# Altium PCB board_layout_alternative.pcbdoc
Units mm, origin at the board's own origin, x right, y up, seen from the top; angles counter-clockwise.
Board outline 98 x 98 mm, 4 copper layers (Top Layer, Mid Layer Top, Mid Layer Bottom, Bottom Layer), stack 1.742 mm thick; 20 components, 0 nets, 54 pads, 0 vias.
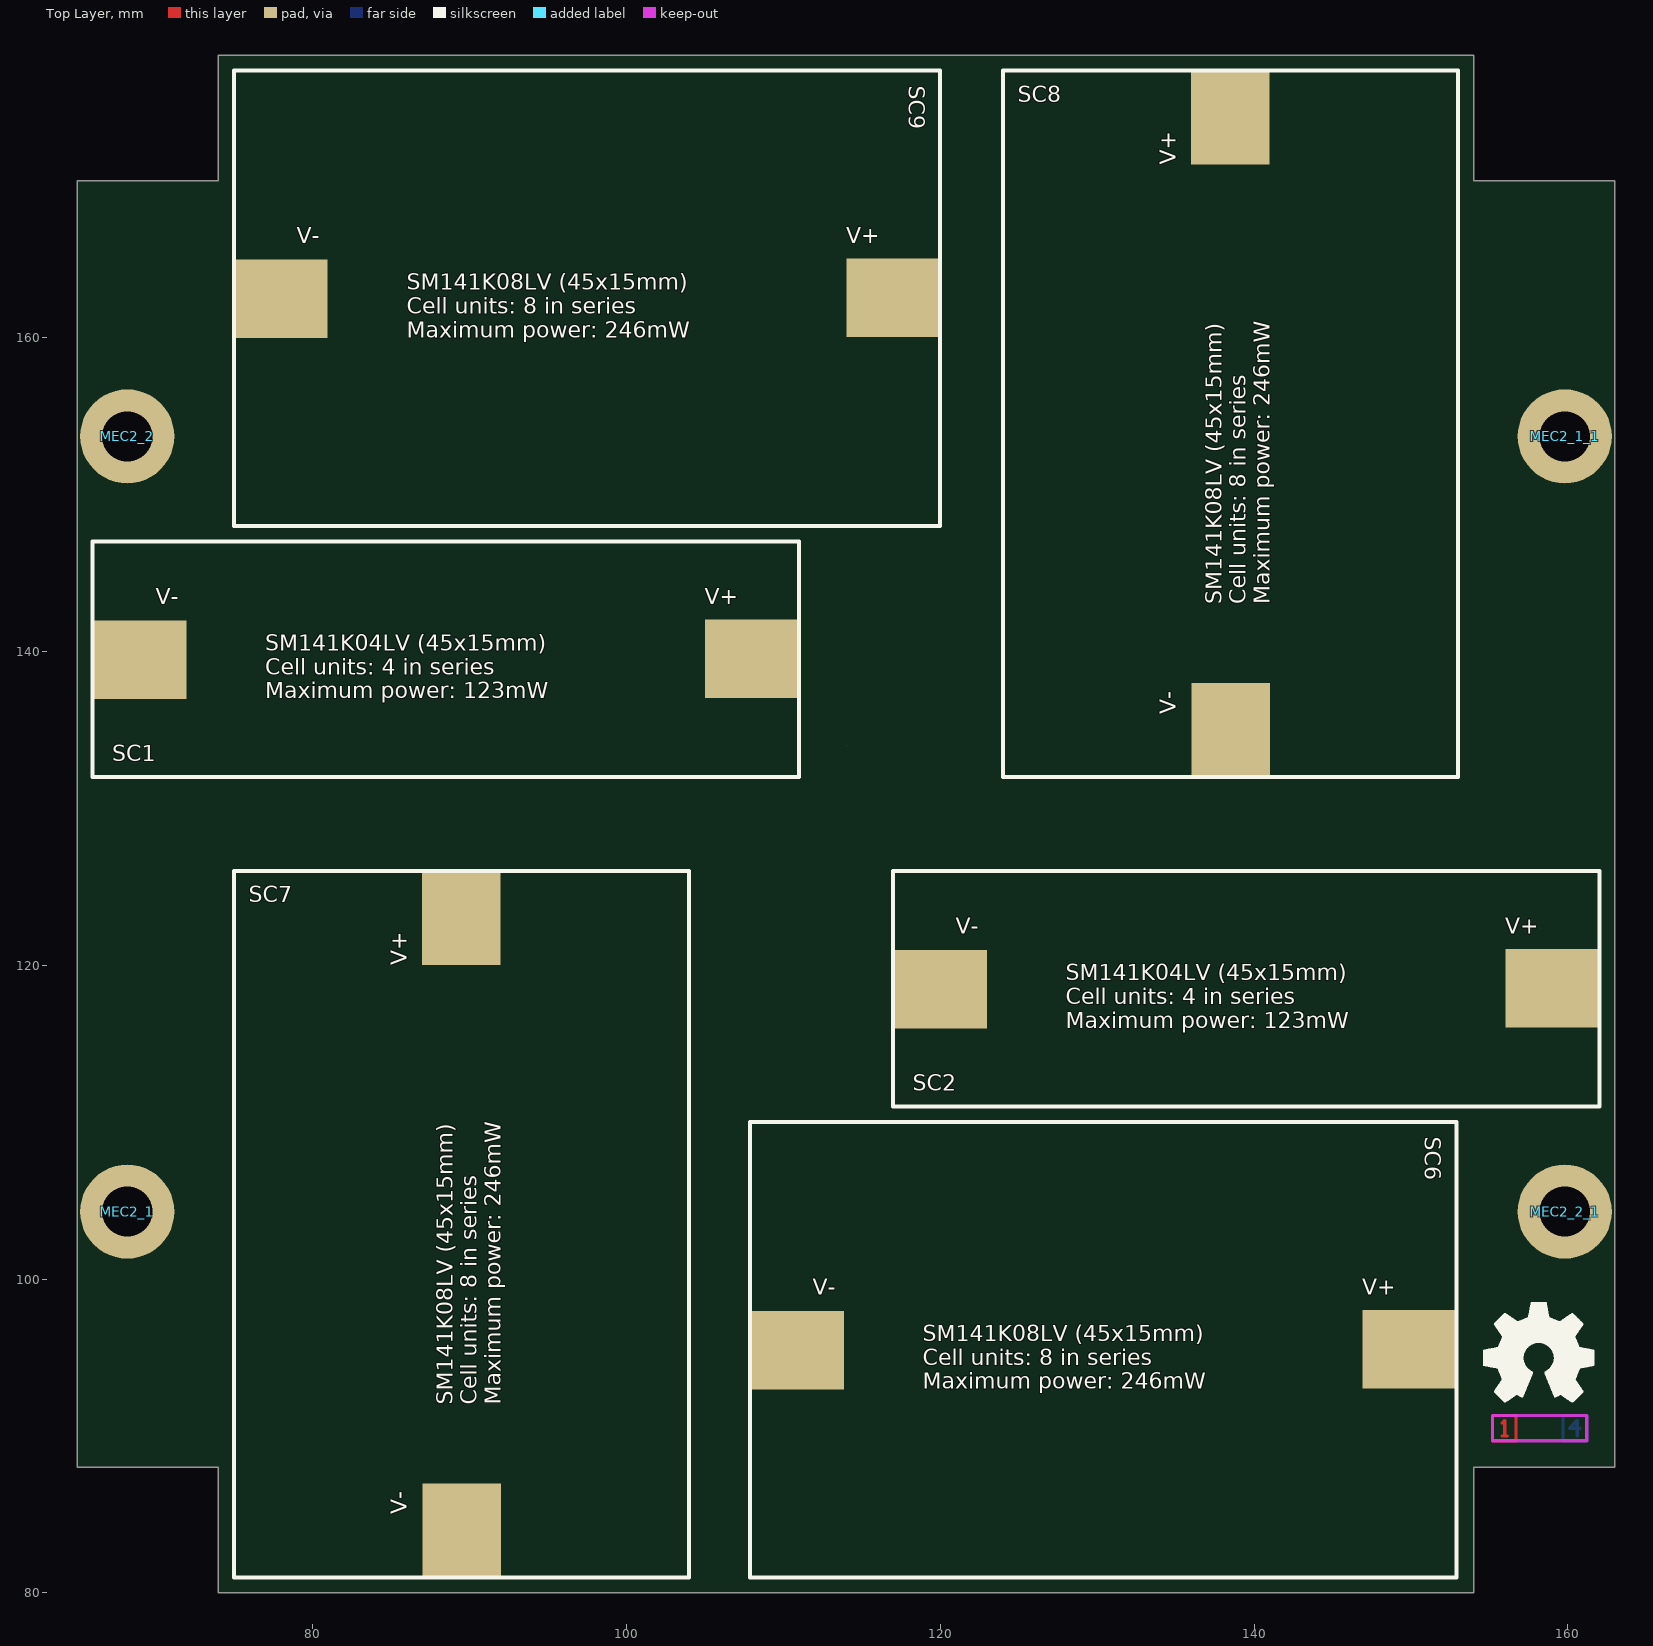
[diagram p0: Top Layer view]
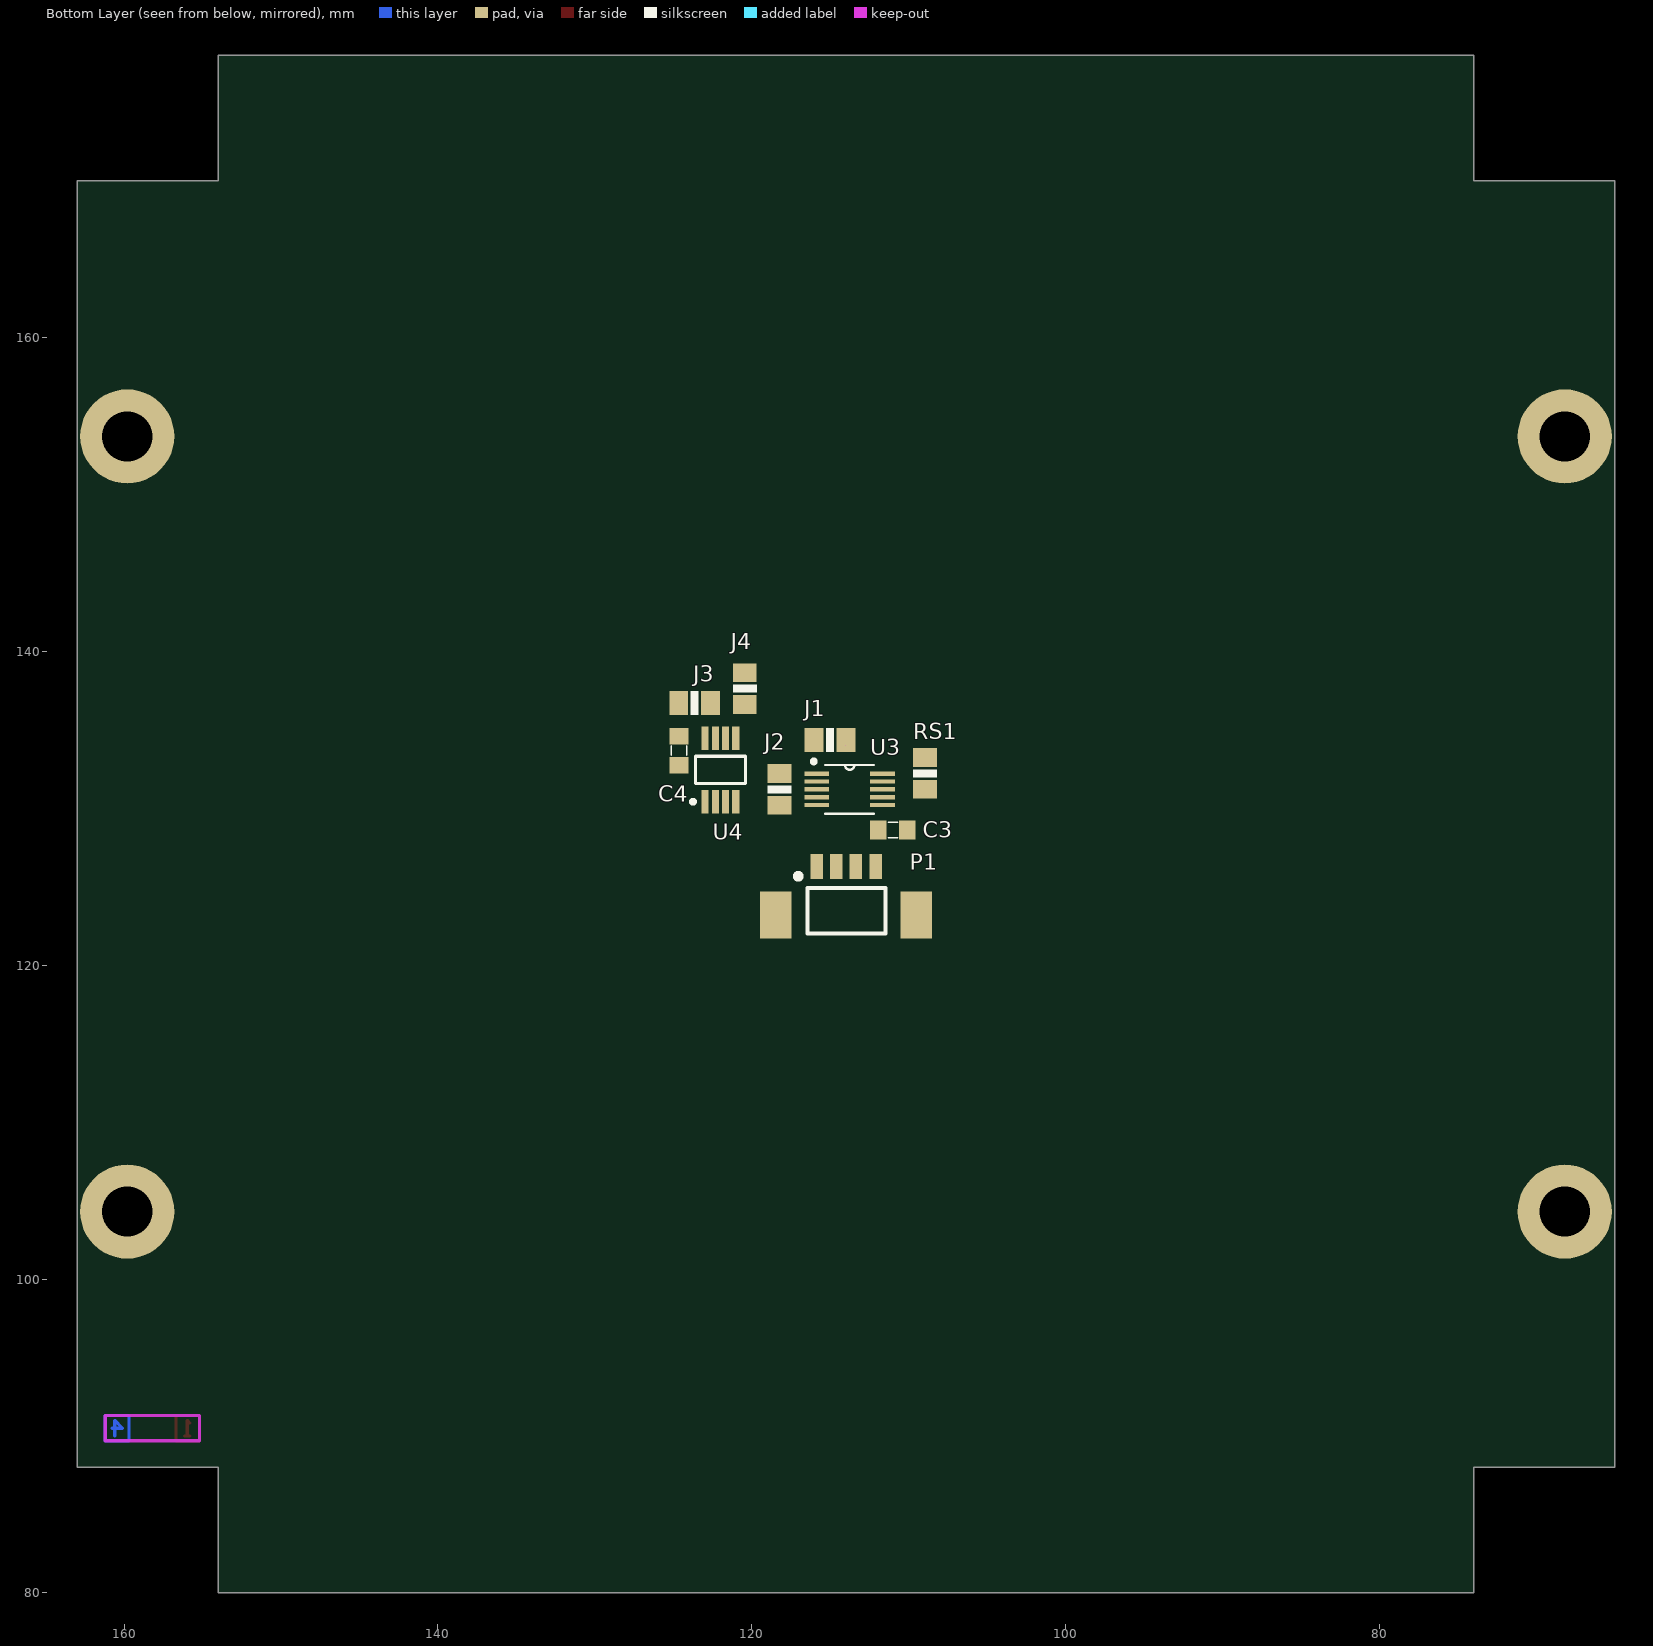
[diagram p1: Bottom Layer view, seen from below]
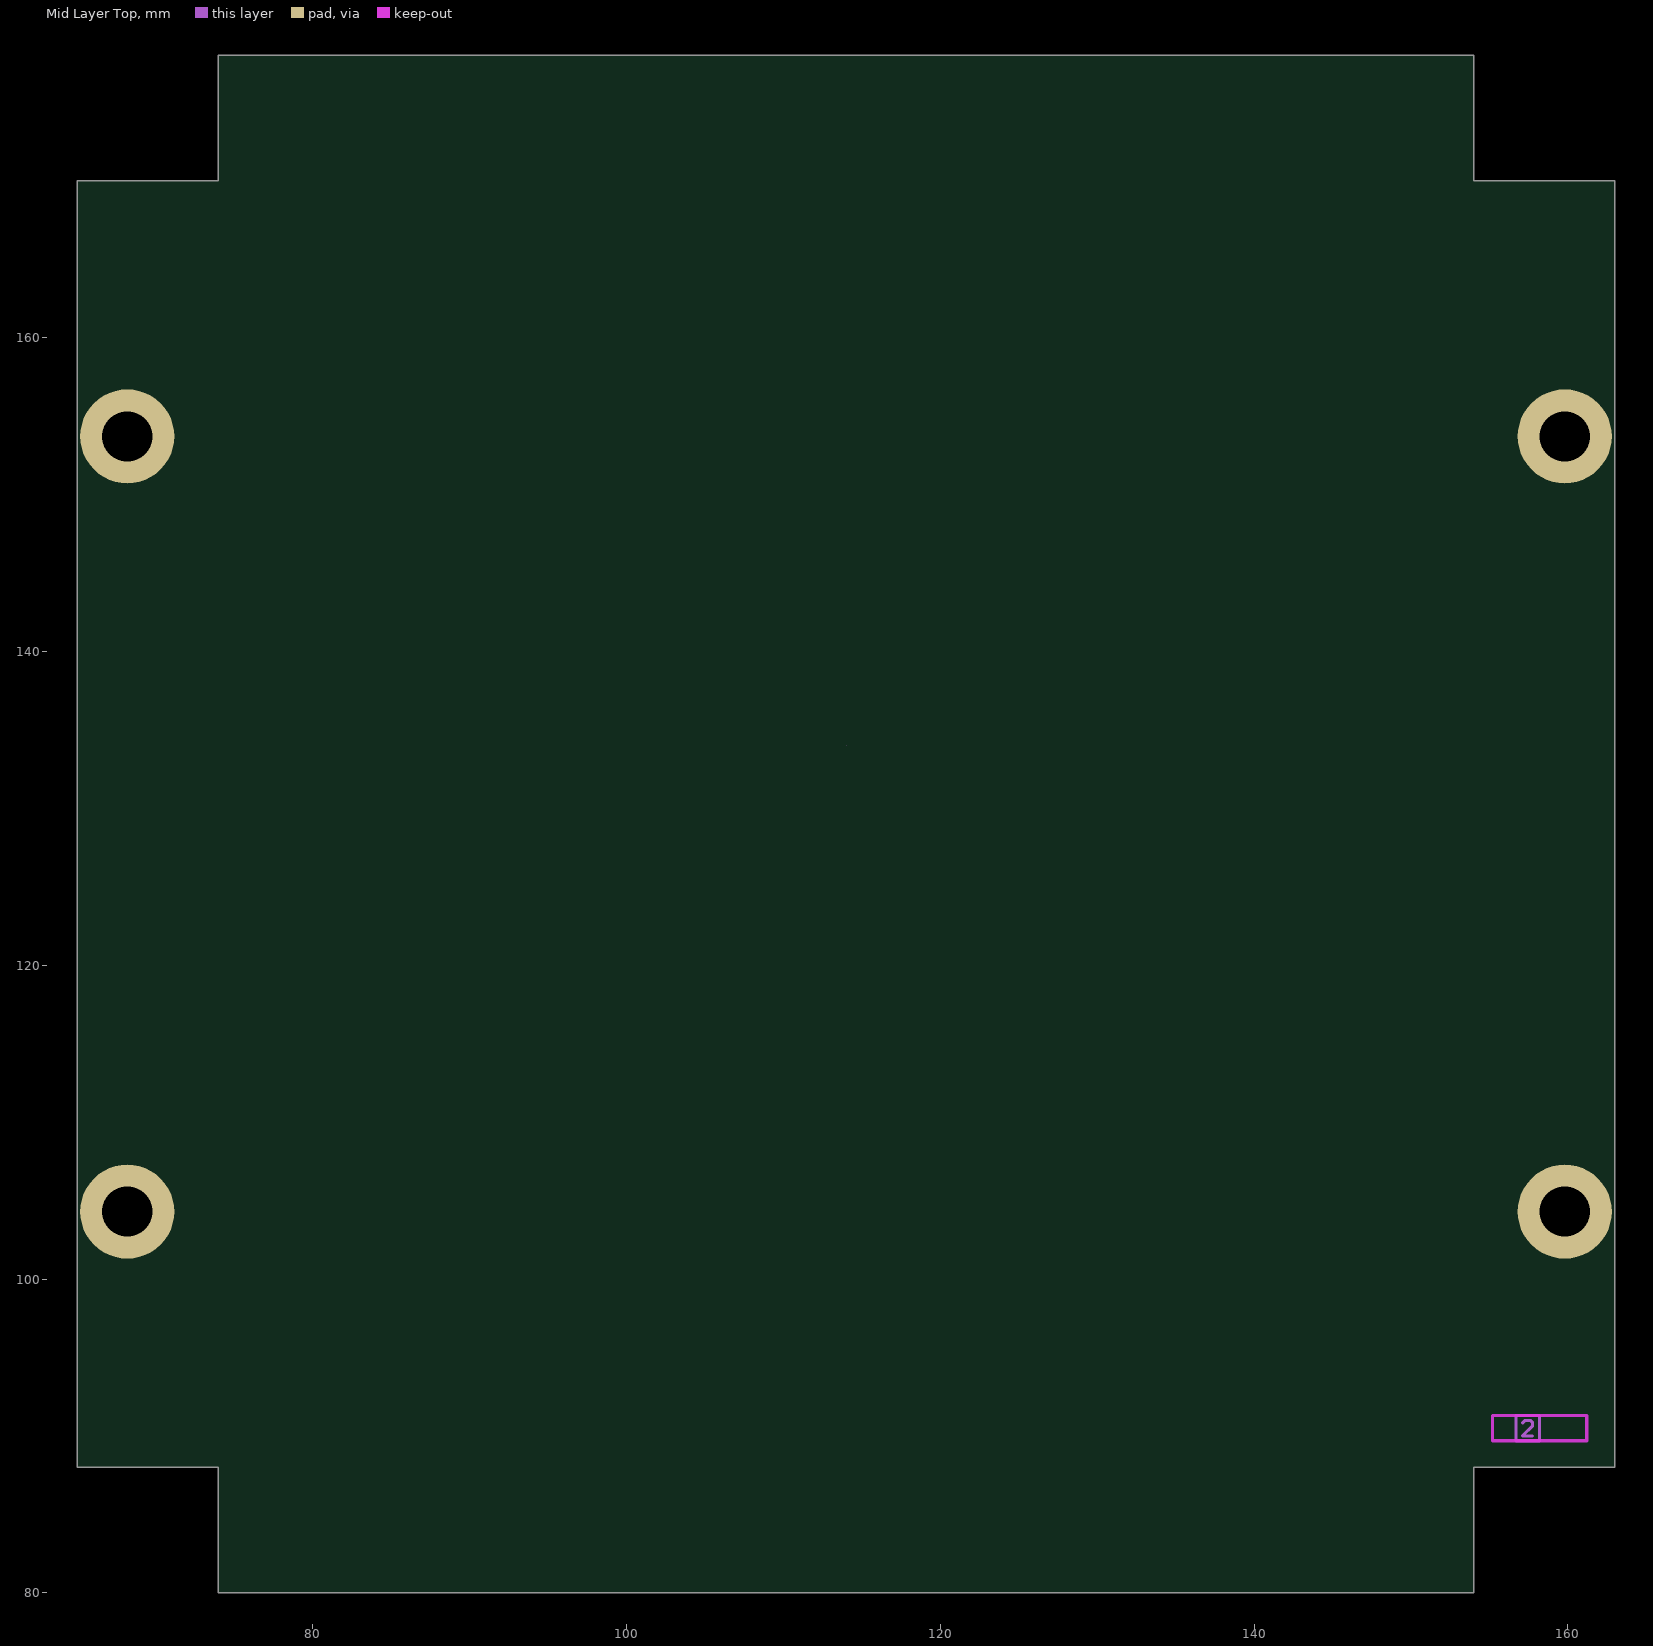
[diagram p2: Mid Layer Top]
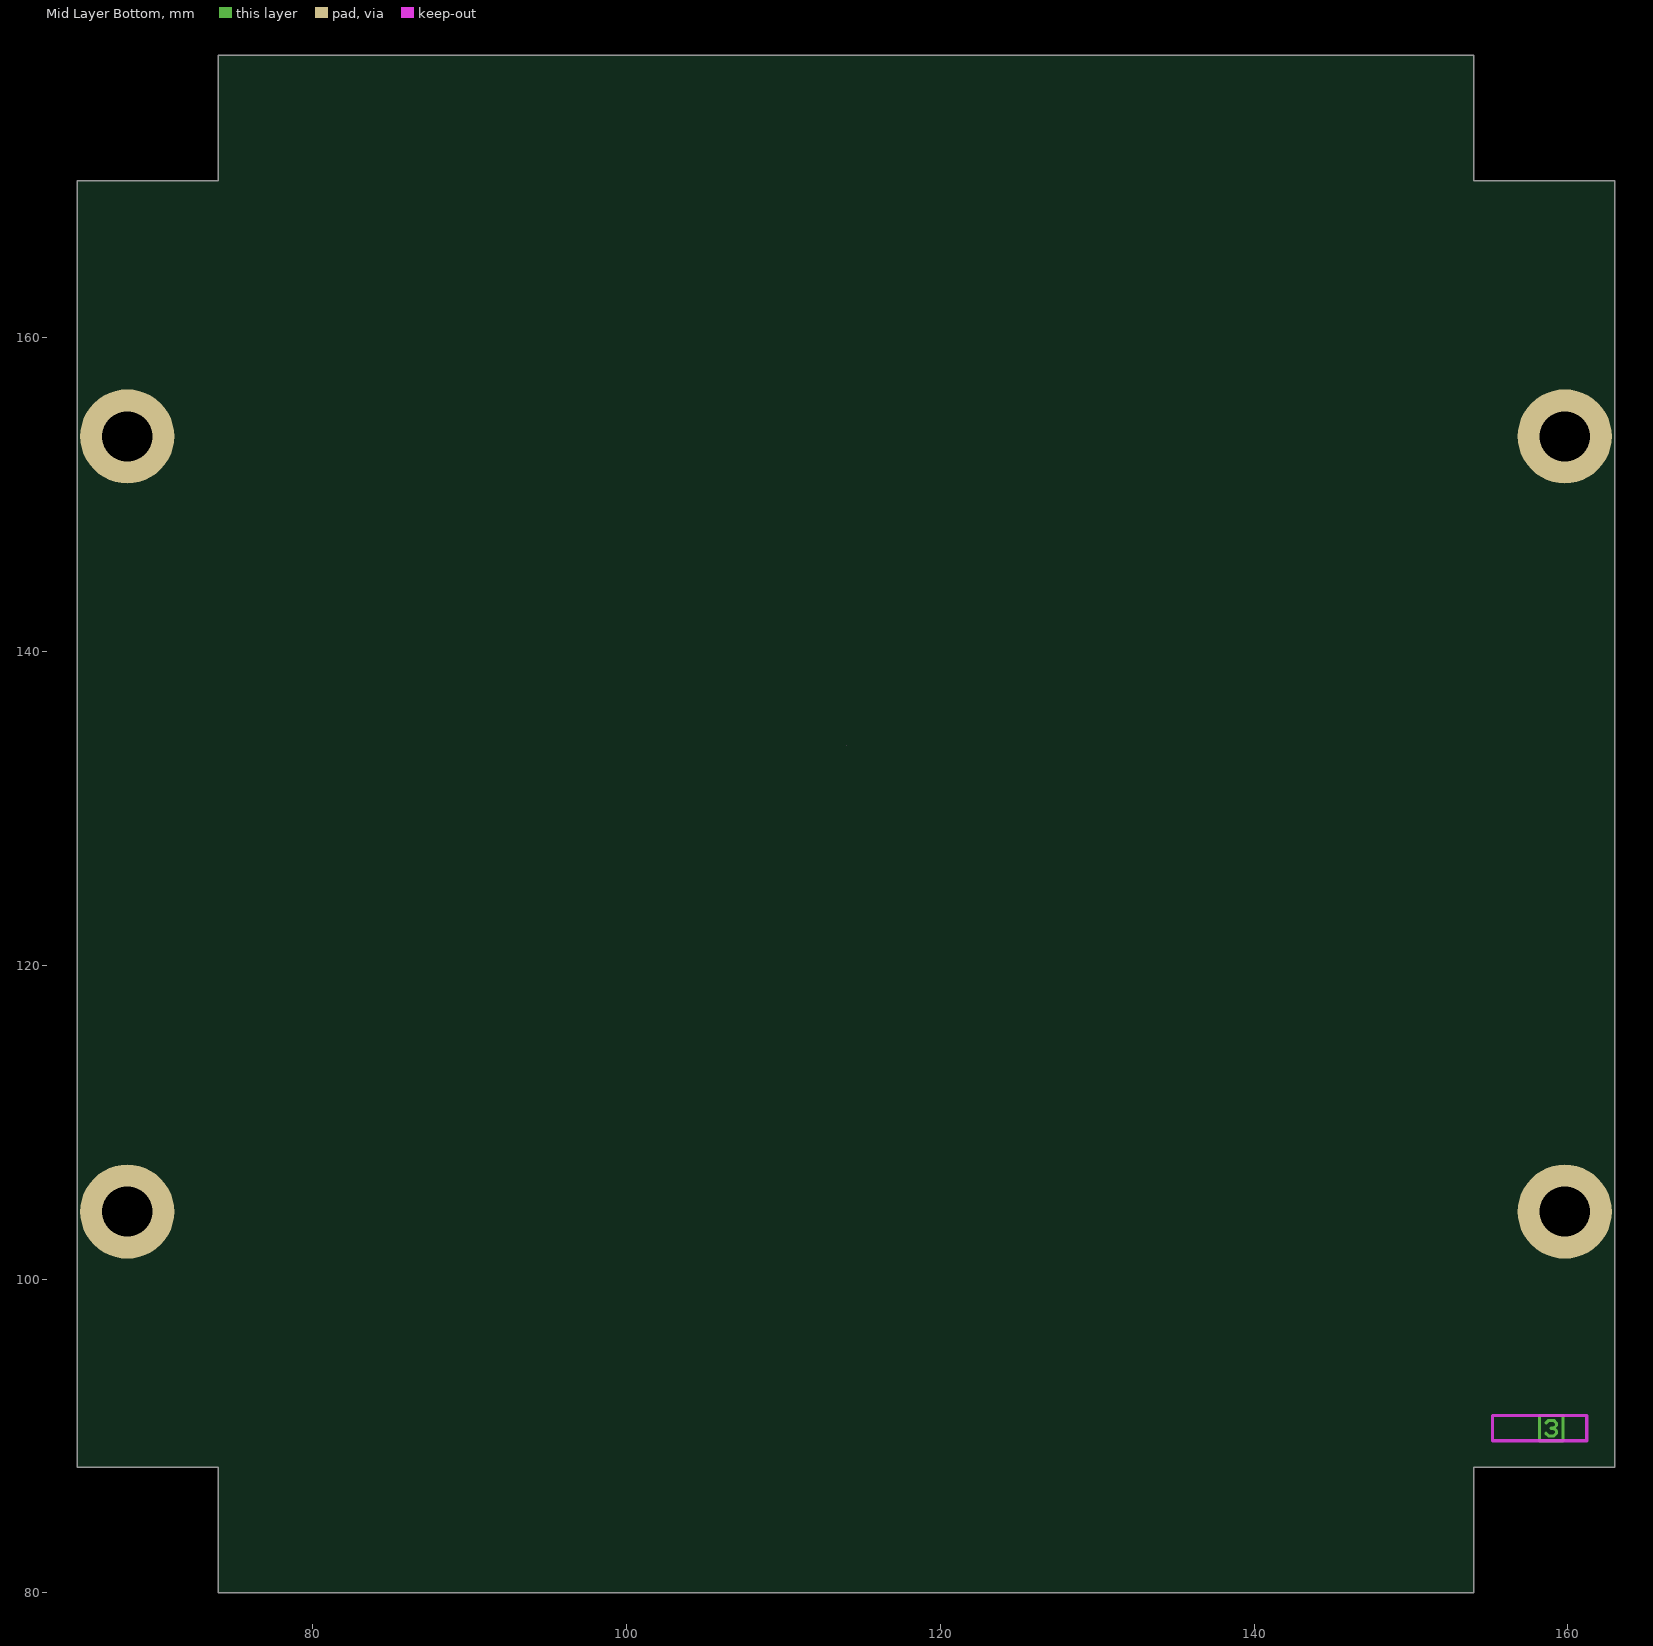
[diagram p3: Mid Layer Bottom]

## Layer stack, top to bottom
Top Solder: solder mask 0.01, Solder Resist, Dk 3.5
Top Layer: signal copper 0.035
Dielectric 1: prepreg 0.0711, PP-006, Dk 4.1
Mid Layer Top: signal copper 0.035
Dielectric Core: core 1.46, FR-4, Dk 4.8
Mid Layer Bottom: signal copper 0.035
Dielectric 2: prepreg 0.0711, PP-006, Dk 4.1
Bottom Layer: signal copper 0.035
Bottom Solder: solder mask 0.01, Solder Resist, Dk 3.5

## Board outline
74,80 74,88 65,88 65,170 74,170 74,178 154,178 154,170 163,170 163,88 154,88 154,80
cut-out: 114,134

## Design rules (kind name [scope] priority, off if disabled: settings)
Clearance Clearance_6 [InNet('GND')] p1: gap=0.254 ignorepadtopadclearanceinfootprint=FALSE except(0: Arc-Hole Track-Hole SMDPad-Hole THPad-Hole Via-Hole Fill-Hole Poly-Hole Region-Hole Text-Hole; 0.178: Arc-Arc Arc-Track Arc-SMDPad Track-Track Track-SMDPad SMDPad-SMDPad; 0.381: Arc-Text Track-Text SMDPad-Text THPad-Text Via-Text; 0.508: Fill-Text Poly-Text Region-Text Text-Text)
Clearance Clearance_1 [InNet('ESD') And OnLayer('Multi-Layer') vs OnLayer('Keep-Out Layer')] p2: gap=0.254 ignorepadtopadclearanceinfootprint=FALSE except(0: Arc-SMDPad Arc-THPad Arc-Via Arc-Hole Track-SMDPad Track-THPad Track-Via Track-Hole SMDPad-Hole THPad-Hole Via-Hole Fill-Hole Poly-Hole Region-Hole Text-Hole; 0.178: Arc-Arc Arc-Track Track-Track SMDPad-SMDPad; 0.381: Arc-Text Track-Text SMDPad-Text THPad-Text Via-Text; 0.508: Fill-Text Poly-Text Region-Text Text-Text)
Clearance Clearance_2 [OnLayer('Multi-Layer') vs OnLayer('Keep-Out Layer')] p3: gap=0.254 ignorepadtopadclearanceinfootprint=FALSE except(0: Arc-SMDPad Arc-THPad Arc-Via Arc-Hole Track-SMDPad Track-THPad Track-Via Track-Hole SMDPad-Hole THPad-Hole Via-Hole Fill-Hole Poly-Hole Region-Hole Text-Hole; 0.178: Arc-Arc Arc-Track Track-Track SMDPad-SMDPad; 0.381: Arc-Text Track-Text SMDPad-Text THPad-Text Via-Text; 0.508: Fill-Text Poly-Text Region-Text Text-Text)
Clearance [All] p4: gap=0.178 ignorepadtopadclearanceinfootprint=FALSE except(0: Arc-Hole Track-Hole SMDPad-Hole THPad-Hole Via-Hole Fill-Hole Poly-Hole Region-Hole Text-Hole; 0.177: Arc-SMDPad Arc-Via Track-SMDPad Track-Via)
DiffPairsRouting DiffPairsRouting_1 [InDifferentialPair('XT2')] p1: maxlimit=0.254 minlimit=0.254 mostfreqgap=0.254 toplayer_minwidth=0.254 toplayer_maxwidth=0.254 toplayer_prefwidth=0.254 midlayer1_minwidth=0.254 midlayer1_maxwidth=0.254 midlayer1_prefwidth=0.254 midlayer2_minwidth=0.254 midlayer2_maxwidth=0.254 midlayer2_prefwidth=0.254 bottomlayer_minwidth=0.254 bottomlayer_maxwidth=0.254 bottomlayer_prefwidth=0.254 maxuncoupledlength=12.7
DiffPairsRouting [All] p2: maxlimit=0.152 minlimit=0.152 mostfreqgap=0.152 toplayer_minwidth=0.457 toplayer_maxwidth=0.457 toplayer_prefwidth=0.457 midlayer1_minwidth=0.457 midlayer1_maxwidth=0.457 midlayer1_prefwidth=0.457 midlayer2_minwidth=0.457 midlayer2_maxwidth=0.457 midlayer2_prefwidth=0.457 bottomlayer_minwidth=0.457 bottomlayer_maxwidth=0.457 bottomlayer_prefwidth=0.457 maxuncoupledlength=12.7
HoleSize [All] p1: absolutevalues=TRUE maxlimit=5.08 minlimit=0.025 maxpercent=80.000 minpercent=20.000
MinimumSolderMaskSliver [All] p1: minsoldermaskwidth=0
PlaneConnect [InNetClass('power')] p1: planeconnectstyle=Direct reliefexpansion=0.508 reliefentries=4 reliefconductorwidth=0.254 reliefairgap=0.254
PlaneConnect PlaneConnect_1 [All] p2: planeconnectstyle=Relief reliefexpansion=0.508 reliefentries=4 reliefconductorwidth=0.254 reliefairgap=0.254
PolygonConnect PolygonConnect_3 [InNet('GND') vs InNet('GND')] p1: thpad.connectstyle=Direct thpad.reliefconductorwidth=0.508 thpad.reliefentries=4 thpad.polygonreliefangle="90 Angle" thpad.airgapwidth=0.254 smdpad.connectstyle=Relief smdpad.reliefconductorwidth=0.508 smdpad.reliefentries=4 smdpad.polygonreliefangle="90 Angle" smdpad.airgapwidth=0.254 via.connectstyle=Direct via.reliefconductorwidth=0.508 via.reliefentries=4 via.polygonreliefangle="90 Angle" via.airgapwidth=0.254
PolygonConnect PolygonConnect_2 [InNet('AGND') vs InNet('AGND')] p2: thpad.connectstyle=Direct thpad.reliefconductorwidth=0.254 thpad.reliefentries=4 thpad.polygonreliefangle="90 Angle" thpad.airgapwidth=0.254 smdpad.connectstyle=Relief smdpad.reliefconductorwidth=0.508 smdpad.reliefentries=4 smdpad.polygonreliefangle="90 Angle" smdpad.airgapwidth=0.254 via.connectstyle=Direct via.reliefconductorwidth=0.254 via.reliefentries=4 via.polygonreliefangle="90 Angle" via.airgapwidth=0.254
PolygonConnect [InNetClass('power')] p3: connectstyle=Direct reliefconductorwidth=0.254 reliefentries=4 polygonreliefangle="90 Angle" airgapwidth=0.254
PolygonConnect PolygonConnect_1 [All] p4: connectstyle=Direct reliefconductorwidth=0.254 reliefentries=4 polygonreliefangle="90 Angle" airgapwidth=0.254
RoutingVias [All] p1: holewidth=0.3 width=0.6 viastyle="Through Hole" minholewidth=0.3 minwidth=0.6 maxholewidth=0.9 maxwidth=1.5
SilkToSilkClearance [All] p1: silktosilkclearance=0.127
SilkToSolderMaskClearance [IsPad] p1: minsilkscreentomaskgap=0 clearancetoexposedcopper=TRUE
SolderMaskExpansion [All] p1: expansion=0.178
Width Width_Power [InNetClass('Power')] p1: maxlimit=0.762 minlimit=0.508 preferedwidth=0.508
Width [All] p2: maxlimit=1.778 minlimit=0.127 preferedwidth=0.254
24 further rules are at their usual default settings.

## Classes and differential pairs
component class 0_architecture: M1 M2 M3 M4 M5 M6 M7 M8

## Components (designator, comment, footprint, x,y, rotation, side; value= is the part's Value field where it differs from the comment)
C3 "0.1uF/25V" CC0805 111.016,128.613 r180 bottom
C4 "0.1uF/25V" CC0805 124.64,133.68 r270 bottom
J1 "1k" 0805 115.016,134.36 r0 bottom
J2 "1k" 0805 118.241,131.211 r90 bottom
J3 "1k" 0805 123.64,136.721 r180 bottom
J4 "1k" 0805 120.45,137.624 r270 bottom
MEC2_1 "M3" "M3 hole" 68.2,104.3 r0 top (schematic designator MEC2)
MEC2_1_1 "M3" "M3 hole" 159.8,153.7 r180 top (schematic designator MEC2)
MEC2_2 "M3" "M3 hole" 68.2,153.7 r180 top (schematic designator MEC2)
MEC2_2_1 "M3" "M3 hole" 159.8,104.3 r0 top (schematic designator MEC2)
P1 "4P_PicoBlade" "HDR4 PicoBlade" 115.866,126.288 r180 bottom
RS1 "0.002R" 0805 108.966,132.227 r90 bottom
SC1 "SC" 45x15mm_cell 66,132 r0 top
SC2 "SC" 45x15mm_cell 117.006,111 r0 top (schematic designator SC1)
SC6 "SC" 45x29mm_cell 107.893,81 r0 top (schematic designator SC5)
SC7 "SC" 45x29mm_cell 104,81 r90 top (schematic designator SC5)
SC8 "SC" 45x29mm_cell 153,132 r90 top (schematic designator SC5)
SC9 "SC" 45x29mm_cell 75,148 r0 top (schematic designator SC5)
U3 "INA226AIDGSR" DGS10 113.766,131.211 r180 bottom
U4 "MCP9808T-E/MS" MSOP-8 122,132.446 r90 bottom

## Footprints (in the part's own frame and the unit in brackets; to place one, negate y for a bottom-side part, rotate by r counter-clockwise, add the part's x,y. Pads: shape width x height; smd on the part's side, far side on the other; paste and mask are expansions set on the pad)
45x15mm_cell [mm]
  rect 6x5 smd: 1(42.025,7.525) 2(2.975,7.475)
  silkscreen extent 0,0 45,15, body extent 0,0 45,15, height 1.8
45x29mm_cell [mm]
  rect 6x5 smd: 1(42.025,14.525) 2(2.975,14.475)
  silkscreen extent 0,0 45,29, body extent 0,0 45,29, height 1.8
0805 [mil]
  rect 47.24x60 smd: 1(-40,0) 2(40,0)
  silkscreen extent -10,-30 10,30, body extent -50,-24 49,25, height 31
CC0805 [mm] "TDK mlccspec_commercial_general_midvoltage_en.pdf"
  rect 1.05x1.2 smd: 1(-0.925,0) 2(0.925,0)
  silkscreen extent -0.3,-0.5 0.3,0.5, body extent -1.25,-0.62 1.25,0.62, height 0.78
DGS10 [mil]
  rect 62x11 smd: 1(-82.5,39.37) 2(-82.5,19.69) 3(-82.5,0) 4(-82.5,-19.68) 5(-82.5,-39.37) 6(82.5,-39.37) 7(82.5,-19.68) 8(82.5,0) 9(82.5,19.69) 10(82.5,39.37)
  silkscreen extent -95,-61 61,75, body extent -97,-59 97,59, height 42
"HDR4 PicoBlade" [mm]
  rect 2x3 smd: 0(-2.6,-3.1) 0(6.35,-3.1)
  rect 0.8x1.6 smd: 1(0,0) 2(1.25,0) 3(2.5,0) 4(3.75,0)
  silkscreen extent -1.26,-4.27 4.37,-0.54, body extent -3.15,-4.42 7,-0.22, height 4.7
"M3 hole" [mm]
  round 6 hole 3.2: 0(0,0)
MSOP-8 [mm] "8-Lead Mini Small Outline Package [MSOP] (RM-8)"
  rect 1.5x0.45 smd: 1(-2.025,0.975) 2(-2.025,0.325) 3(-2.025,-0.325) 4(-2.025,-0.975) 5(2.025,-0.975) 6(2.025,-0.325) 7(2.025,0.325) 8(2.025,0.975)
  silkscreen extent -2.15,-1.6 0.87,1.88, body extent -2.46,-1.5 2.46,1.5, height 1.1

## Part data
C3 C4: library part Cap_Cer_X7R_0.1uF_25V_0805, "CAP CER 0.1UF 25V 10% X7R 0805", PartNumber=CC0805KRX7R8BB104, NCM=8532.24.10
J1 J2 J3 J4: library part R1.0k_1%_1/8W_0805, "RES 1.0K OHM 1/8W 1% 0805", PartNumber=RC0805FR-071KL, NCM=8533.21.20
MEC2_1 MEC2_1_1 MEC2_2 MEC2_2_1: library part "M3 hole", "M3 hole"
P1: library part "Header 4_PicoBlade", "Header, 4-Pin", Color=Natural, Contact Resistance=20mR, Current Rating=1A, Flammability Rating="UL94 V-0", Insulation Resistance=100MR, Manufacturer=Molex, Manufacturer Part Number=53398-0471, Max Operating Temperature=85°C, Min Operating Temperature=-40°C, Package Quantity=1000, Supplier Part Number 1=538-53398-0471, Voltage Rating=125V, Body Plating=Tin, ComponentLink1Description=http://www.mouser.com/ds/2/276/0533980471_PCB_HEADERS-171069.pdf?src-supplier=Mouser, ComponentLink1URL=http://www.mouser.com/ds/2/276/0533980471_PCB_HEADERS-171069.pdf?src-supplier=Mouser, ComponentLink2Description=http://www.jameco.com/Jameco/Products/ProdDS/1932627.pdf?src-supplier=Jameco, ComponentLink2URL=http://www.jameco.com/Jameco/Products/ProdDS/1932627.pdf?src-supplier=Jameco, ComponentLink3Description=https://www.distrelec.biz/Web/Downloads/46/_e/gf116833-116846_e.pdf?mime=application%2Fpdf&src-supplier=Distrelec, ComponentLink3URL=https://www.distrelec.biz/Web/Downloads/46/_e/gf116833-116846_e.pdf?mime=application%2Fpdf&src-supplier=Distrelec, ComponentLink4Description=http://www.molex.com/webdocs/datasheets/pdf/en-us/0533980471_PCB_HEADERS.pdf?src-supplier=Element14, ComponentLink4URL=http://www.molex.com/webdocs/datasheets/pdf/en-us/0533980471_PCB_HEADERS.pdf?src-supplier=Element14, ComponentLink5Description=http://www.farnell.com/datasheets/1867381.pdf?src-supplier=Element14, ComponentLink5URL=http://www.farnell.com/datasheets/1867381.pdf?src-supplier=Element14, ComponentLink6Description=http://uk.rs-online.com/webdocs/13c4/0900766b813c4500.pdf?src-supplier=RSComponents, ComponentLink6URL=http://uk.rs-online.com/webdocs/13c4/0900766b813c4500.pdf?src-supplier=RSComponents, ComponentLink7Description=http://www.molex.com/webdocs/datasheets/pdf/en-us/0533980471_PCB_HEADERS.pdf?src-supplier=Farnell, ComponentLink7URL=http://www.molex.com/webdocs/datasheets/pdf/en-us/0533980471_PCB_HEADERS.pdf?src-supplier=Farnell, ComponentLink8Description=http://www.farnell.com/datasheets/2697809.pdf?src-supplier=Element14, ComponentLink8URL=http://www.farnell.com/datasheets/2697809.pdf?src-supplier=Element14, ComponentLink9Description=http://www.molex.com/webdocs/datasheets/pdf/en-us/0533980471_PCB_HEADERS.pdf?src-supplier=Avnet, ComponentLink9URL=http://www.molex.com/webdocs/datasheets/pdf/en-us/0533980471_PCB_HEADERS.pdf?src-supplier=Avnet, ComponentLink10Description=http://www.molex.com/webdocs/datasheets/pdf/en-us/0533980471_PCB_HEADERS.pdf?src-supplier=Avnet+Europe, ComponentLink10URL=http://www.molex.com/webdocs/datasheets/pdf/en-us/0533980471_PCB_HEADERS.pdf?src-supplier=Avnet+Europe, Contact Material=Bronze,Tin,Brass, Contact Plating=Tin, Gender=Male, Glow Wire Compliant=Non-compliant, Housing Color=Natural, Housing Material=Nylon, LatestRevisionDate=17-Jul-2002, LatestRevisionNote="Re-released for DXP Platform.", Lead Free="Lead Free", Lead Pitch=1.25mm, Mount="Surface Mount", Number of Circuits=4, Number of Contacts=4, Number of Positions=4, Number of Rows=1, Orientation=Vertical, Packaging="Tape and Reel", PartNumber=53398-0471, Pitch=1.25mm, Pricing 1="1=0.98, 10=0.832, 100=0.716, 500=0.6, 1000=0.391, 2000=0.342 (USD)", Pricing 2="1=1.19, 10=1.044, 100=0.901, 500=0.73716 (USD)", Publisher="Altium Limited", Radiation Hardening=No, REACH SVHC=Unknown, Stock 1=43251, Stock 2=20817, Supplier 1=Mouser, Supplier 2=Digi-Key, Supplier Part Number 2=WM7608CT-ND, Termination=Solder, Voltage Rating (AC)=125V, Voltage Rating (DC)=125V, Working Voltage=125V
RS1: library part R0.002R_3%_0.5W_0805, "Current Sense Resistors - SMD 0.002 ohm 3% 0.5W Current Sense", PartNumber=LVT08R0020HER
SC1 SC2: library part solar_cell_sm141k04lv, "sm141k04lv", Part Number=sm141k04lv, PartNumber=sm141k04lv, size=45x15mm
SC6 SC7 SC8 SC9: library part solar_cell_sm141k08lv, "sm141k08lv", Part Number=sm141k08lv, PartNumber=sm141k08lv, size=45x29mm
U3: "High-Side Measurement, Bi-Directional Current/Power Monitor w/I2C Interface", Manufacturer="Texas Instruments", PACKAGE_DESIGNATOR=DGS, Copyright="Copyright (C) 2018 Accelerated Designs. All rights reserved", Datasheet_URL=http://www.ti.com/lit/gpn/INA226, FAMILY_NAME="CURRENT SHUNT MONITOR", GENERIC_PART_NUMBER=INA226, INDUSTRY_STD_PKG_TYPE=MSOP, Manufacturer_Part_Number=INA226AIDGSR, PIN_COUNT=10, RefDes=RefDes, Type=DEV, Vendor="Texas Instruments"
U4: library part MCP9808, PartNumber=MCP9808T-E/MS

## Nets (pads, with @x,y where several pads share a name; then routed paths per layer and width w, separated by ;. In a path a pad name is that pad's centre, name@x,y a point inside that pad or via, vN(x,y) a via of type N, cw(c..) or ccw(c..) an arc to the next point about the centre after c; other vN are vias at no path point)
pads on no net: C3.1 C3.2 C4.1 C4.2 J1.1 J1.2 J2.1 J2.2 J3.1 J3.2 J4.1 J4.2 MEC2_1.0 MEC2_1_1.0 MEC2_2.0 MEC2_2_1.0 P1.0 P1.1 P1.2 P1.3 P1.4 RS1.1 RS1.2 SC1.1 SC1.2 SC2.1 SC2.2 SC6.1 SC6.2 SC7.1 SC7.2 SC8.1 SC8.2 SC9.1 SC9.2 U3.1 U3.2 U3.3 U3.4 U3.5 U3.6 U3.7 U3.8 U3.9 U3.10 U4.1 U4.2 U4.3 U4.4 U4.5 U4.6 U4.7 U4.8
copper on no net: | length 33.9
  Top Layer w0.2: 155.8,90 155.975,90 ; 155.8,90.825 155.975,91 155.975,90 ; 156.15,90 155.975,90 ; 155.2,89.7 155.2,91.3 156.7,91.3 156.7,89.7 155.2,89.7
  Mid Layer Top w0.2: 157.1,90.825 157.275,91 157.6,91 157.75,90.85 157.75,90.65 157.1,90 157.75,90 ; 156.7,89.7 158.2,89.7 158.2,91.3 156.7,91.3 156.7,89.7
  Mid Layer Bottom w0.2: 158.6,90.175 158.775,90 159.1,90 159.275,90.175 159.275,90.325 159.1,90.5 ; 158.6,90.825 158.775,91 159.1,91 159.275,90.825 159.275,90.675 159.1,90.5 ; 158.925,90.5 159.1,90.5 ; 158.2,89.7 158.2,91.3 159.7,91.3 159.7,89.7 158.2,89.7
  Bottom Layer w0.2: 160.6,90 160.6,91 160.1,90.5 160.775,90.5 ; 159.7,89.7 161.2,89.7 161.2,91.3 159.7,91.3 159.7,89.7

## Keep-outs
Keep-Out Layer:
  lines w0.2: 155.2,89.7 155.2,91.3 161.2,91.3 161.2,89.7 155.2,89.7

## Other copper
Top Layer:
  region: 125,135
  text "'.Layer_Name'" at 231.245,45.003 h2.5
Bottom Layer:
  text "'.Layer_Name'" at 231.245,45.003 h2.5

## Silkscreen, mask and mechanical layers (free items; w line width, h text height)
Top Overlay:
  drawing of 971 lines, arcs and shapes, not listed
  text "'.Layer_Name'" at 231.245,45.003 h2.5
Bottom Overlay:
  text "'.Layer_Name'" at 231.245,45.003 h2.5
Top Paste:
  text "'.Layer_Name'" at 231.245,45.003 h2.5
Bottom Paste:
  text "'.Layer_Name'" at 231.245,45.003 h2.5
Top Solder:
  rectangle: 155,89.5 161.4,91.5
  lines w0.2: 155,89.7 ccw(c155.2,89.7) 155.2,89.5 161.2,89.5 ccw(c161.2,89.7) 161.4,89.7 161.4,91.3 ccw(c161.2,91.3) 161.2,91.5 155.2,91.5 ccw(c155.2,91.3) 155,91.3 155,89.7
  text "'.Layer_Name'" at 231.245,45.003 h2.5
Bottom Solder:
  rectangle: 155,89.5 161.4,91.5
  lines w0.2: 155,89.7 ccw(c155.2,89.7) 155.2,89.5 161.2,89.5 ccw(c161.2,89.7) 161.4,89.7 161.4,91.3 ccw(c161.2,91.3) 161.2,91.5 155.2,91.5 ccw(c155.2,91.3) 155,91.3 155,89.7
  text "'.Layer_Name'" at 231.245,45.003 h2.5
Drill Guide:
  text "'.Layer_Name'" at 231.245,45.003 h2.5
3D Body:
  text "'.Layer_Name'" at 231.275,44.958 h2.5
Dimension:
  text "'.Layer_Name'" at 231.245,45.003 h2.5
Mechanical 3:
  text "'.Layer_Name'" at 238.57,51.195 h2.5
Mechanical 4:
  text "'.Layer_Name'" at 238.57,51.195 h2.5
Mechanical 8:
  text "'.Layer_Name'" at 238.57,51.195 h2.5
Board Edge:
  the board outline again, w0.254
ASM Bottom:
  text "'.Layer_Name'" at 231.275,45.008 h2.5
ASM Top:
  text "'.Layer_Name'" at 231.245,45.003 h2.5
Sheet:
  drawing of 339 lines, arcs and shapes, not listed
  text "1" at 62.42,218.152 h1.78
  text "2" at 135.064,218.152 h1.78
  text "3" at 208.216,218.152 h1.78
  text "4" at 281.114,218.152 h1.78
  text "Layer" at 185.254,197.33 h1.52
  text "Name" at 195.666,197.33 h1.52
  text "Material" at 222.328,197.33 h1.52
  text "Thickness" at 244.166,197.33 h1.52
  text "Constant" at 260.672,197.33 h1.52
  text "Board Layer Stack" at 275.147,197.33 h1.52
  text "A" at 28.079,195.14 h1.78
  text "A" at 315.099,195.14 h1.78
  text "Top Overlay" at 195.666,194.282 h1.52
  text "Top Solder" at 195.666,191.234 h1.52
  text "Solder Resist" at 222.328,191.234 h1.52
  text "0,39mil" at 244.166,191.234 h1.52
  text "3,5" at 260.672,191.234 h1.52
  text "1" at 185.254,188.186 h1.52
  text "Top Layer" at 195.666,188.186 h1.52
  text "Copper" at 222.328,188.186 h1.52
  text "1,38mil" at 244.166,188.186 h1.52
  text "Dielectric 1" at 195.666,185.138 h1.52
  text "PP-006" at 222.328,185.138 h1.52
  text "2,80mil" at 244.166,185.138 h1.52
  text "4,1" at 260.672,185.138 h1.52
  text "2" at 185.254,182.09 h1.52
  text "Mid Layer Top" at 195.666,182.09 h1.52
  text "Copper" at 222.328,182.09 h1.52
  text "1,38mil" at 244.166,182.09 h1.52
  text "Dielectric Core" at 195.666,179.042 h1.52
  text "FR-4" at 222.328,179.042 h1.52
  text "57,48mil" at 244.166,179.042 h1.52
  text "4,8" at 260.672,179.042 h1.52
  text "3" at 185.254,175.994 h1.52
  text "Mid Layer Bottom" at 195.666,175.994 h1.52
  text "Copper" at 222.328,175.994 h1.52
  text "1,38mil" at 244.166,175.994 h1.52
  text "Dielectric 2" at 195.666,172.946 h1.52
  text "PP-006" at 222.328,172.946 h1.52
  text "2,80mil" at 244.166,172.946 h1.52
  text "4,1" at 260.672,172.946 h1.52
  text "4" at 185.254,169.898 h1.52
  text "Bottom Layer" at 195.666,169.898 h1.52
  text "Copper" at 222.328,169.898 h1.52
  text "1,38mil" at 244.166,169.898 h1.52
  text "Bottom Solder" at 195.666,166.85 h1.52
  text "Solder Resist" at 222.328,166.85 h1.52
  text "0,39mil" at 244.166,166.85 h1.52
  text "3,5" at 260.672,166.85 h1.52
  text "Bottom Overlay" at 195.666,163.802 h1.52
  text "B" at 28.079,147.083 h1.78
  text "B" at 315.099,147.083 h1.78
  text "Fabrication specifications:" at 183.381,126.344 h3.1
  text "- Copper base 1OZ:  / - PCB Material: Prepeg FR4-Standard / - PCB Tickness: 1.6mm / - PCB Surface: HASL (with lead)" at 183.375,109.36 h1.73
  text "- Silkscreen Color: White (top and bottom) / - Soldermask Color: Blue / - Vias: Force Complete Tenting / - Special: Stack-up (herein included)" at 241.075,109.36 h1.73
  text "Assembly specifications:" at 183.656,103.364 h3.1
  text "C" at 28.079,98.569 h1.78
  text "C" at 315.099,98.569 h1.78
  text "- Solder composition: Include lead / - Fiducials: 3 top and 3 bottom avaliable / - Check BOM for not placed components" at 183.65,86.37 h1.73
  text "Notes:" at 183.781,83.512 h3.1
  text "- 3960mm^2/6570mm^2 of solar cells area / - Center screws for devices attachment" at 183.65,66 h1.73
  text "SpaceLab - Federal University of Santa Catarina" at 224.174,54.541 h2.5
  text "D" at 28.079,50.563 h1.78
  text "D" at 315.099,50.563 h1.78
  text "Project:" at 224.174,50.041 h2.5
  text "SPZ" at 232.174,50.041 h2.5
  text "Layer:" at 224.174,45.041 h2.5
  text "Designed by:" at 224.174,40.041 h2.5
  text "Project Code:" at 282.174,40.041 h2.5
  text "SPZ" at 296.674,40.041 h2.5
  text "Andre M. P. Mattos" at 238.1,40.008 h2.5
  text "v0.1" at 262.2,35.108 h2.5
  text "Date:" at 224.174,35.041 h2.5
  text "'.Print_Date'" at 230.174,35.041 h2.5
  text "Version:" at 253.174,35.041 h2.5
  text "Size:" at 282.174,35.041 h2.5
  text "A4" at 288.174,35.041 h2.5
  text "1" at 62.42,30.192 h1.78
  text "2" at 135.064,30.192 h1.78
  text "3" at 208.216,30.192 h1.78
  text "4" at 281.114,30.192 h1.78
Drill Drawing:
  circle w0.254: c185.438,139.054 r0.675
  lines w0.381: 183.535,137.466 297.446,137.466 ; 183.535,140.506 297.446,140.506 ; 194.861,134.427 194.861,143.545 ; 204.687,134.427 204.687,143.545 ; 228.488,134.427 228.488,143.545 ; 238.902,134.427 238.902,143.545 ; 253.934,134.427 253.934,143.545 ; 284.419,134.427 284.419,143.545 ; 183.535,134.427 297.446,134.427 297.446,143.545 183.535,143.545 183.535,134.427
  text "Symbol" at 185.359,141.417 h1.46
  text "Count" at 195.773,141.417 h1.46
  text "Hole Size" at 205.598,141.417 h1.46
  text "Plated" at 229.4,141.417 h1.46
  text "Hole Type" at 239.814,141.417 h1.46
  text "Drill Layer Pair" at 254.846,141.417 h1.46
  text "Via/Pad" at 285.331,141.417 h1.46
  text "4" at 195.773,138.378 h1.22
  text "3,200mm (125,98mil)" at 205.598,138.378 h1.22
  text "PTH" at 229.4,138.378 h1.22
  text "Round" at 239.814,138.378 h1.22
  text "Top Layer - Bottom Layer" at 254.846,138.378 h1.22
  text "Pad" at 285.331,138.378 h1.22
  text "4 Total" at 195.773,135.339 h1.22
  text "'.Layer_Name'" at 231.245,45.003 h2.5
  text "'.Layer_Name'" at 231.245,45.003 h2.5

## Dimensions
163,170 to 154,178 on Dimension
159.8,104.3 to 163,88 on Dimension
65,170 to 74,178 on Dimension
74,178 to 154,178 on Dimension
154,178 to 163,170 on Dimension
154,80 to 163,88 on Dimension
162.978,104.3 to 159.778,88 on Dimension
163,170 to 159.8,153.7 on Dimension
159.8,153.7 to 159.8,104.3 on Dimension
147.6,178 to 147.6,80 on Dimension
65,170 to 163,170 on Dimension

## Text inside footprints (layer, text, board x,y; h text height)
SC1: Top Overlay "SM141K04LV (45x15mm) / Cell units: 4 in series / Maximum power: 123mW" at 77,137 h1.02; Top Overlay "V-" at 70,143 h1.02; Top Overlay "V+" at 105,143 h1.02
SC2: Top Overlay "SM141K04LV (45x15mm) / Cell units: 4 in series / Maximum power: 123mW" at 128.006,116 h1.02; Top Overlay "V-" at 121.006,122 h1.02; Top Overlay "V+" at 156.006,122 h1.02
SC6: Top Overlay "SM141K08LV (45x15mm) / Cell units: 8 in series / Maximum power: 246mW" at 118.893,93 h1.02; Top Overlay "V-" at 111.893,99 h1.02; Top Overlay "V+" at 146.893,99 h1.02
SC7: Top Overlay "SM141K08LV (45x15mm) / Cell units: 8 in series / Maximum power: 246mW" at 92,92 h1.02 r90; Top Overlay "V-" at 86,85 h1.02 r90; Top Overlay "V+" at 86,120 h1.02 r90
SC8: Top Overlay "SM141K08LV (45x15mm) / Cell units: 8 in series / Maximum power: 246mW" at 141,143 h1.02 r90; Top Overlay "V-" at 135,136 h1.02 r90; Top Overlay "V+" at 135,171 h1.02 r90
SC9: Top Overlay "SM141K08LV (45x15mm) / Cell units: 8 in series / Maximum power: 246mW" at 86,160 h1.02; Top Overlay "V-" at 79,166 h1.02; Top Overlay "V+" at 114,166 h1.02